# Altium PCB Design Exercise 4 - Surface Mount Board.PcbDoc
Units mil, origin at the board's own origin, x right, y up, seen from the top; angles counter-clockwise.
Board outline 6000 x 4000 mil, 2 copper layers (Top Layer, Bottom Layer); 21 components, 20 nets, 87 pads, 22 vias.
Unrouted connection lines stored in the file: 4.
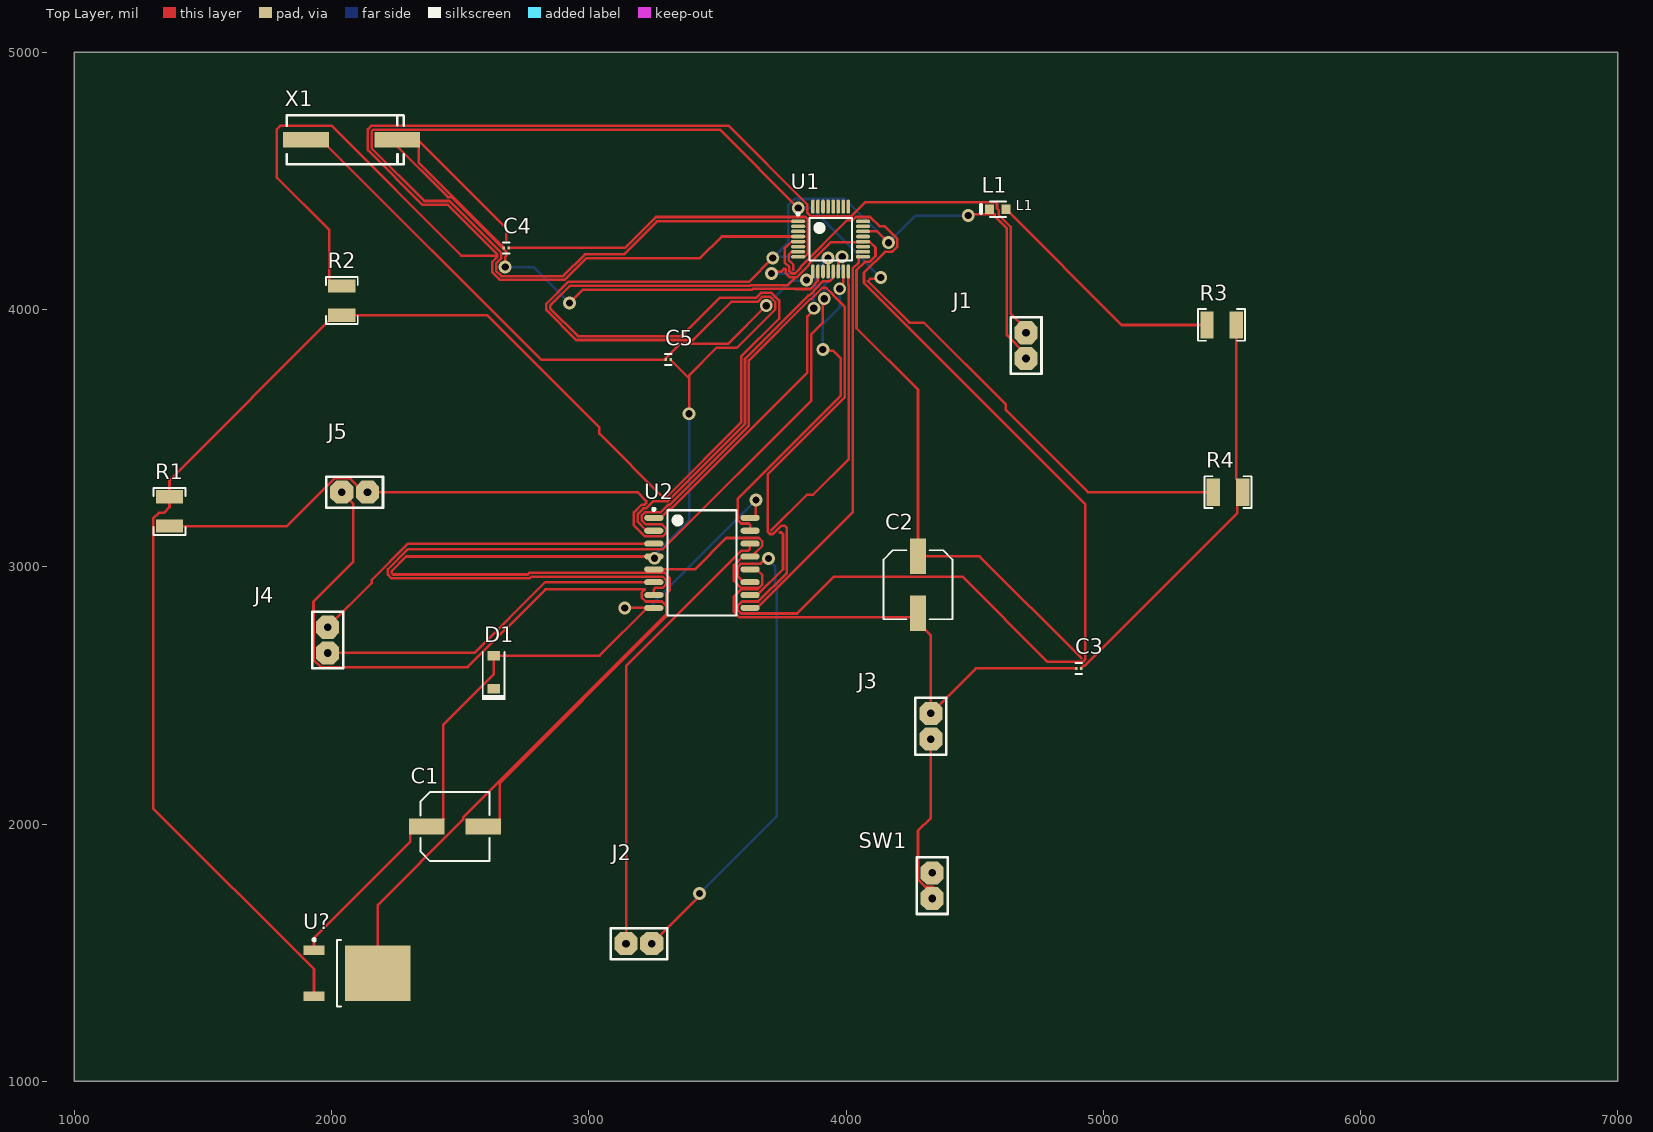
[diagram p0: Top Layer view]
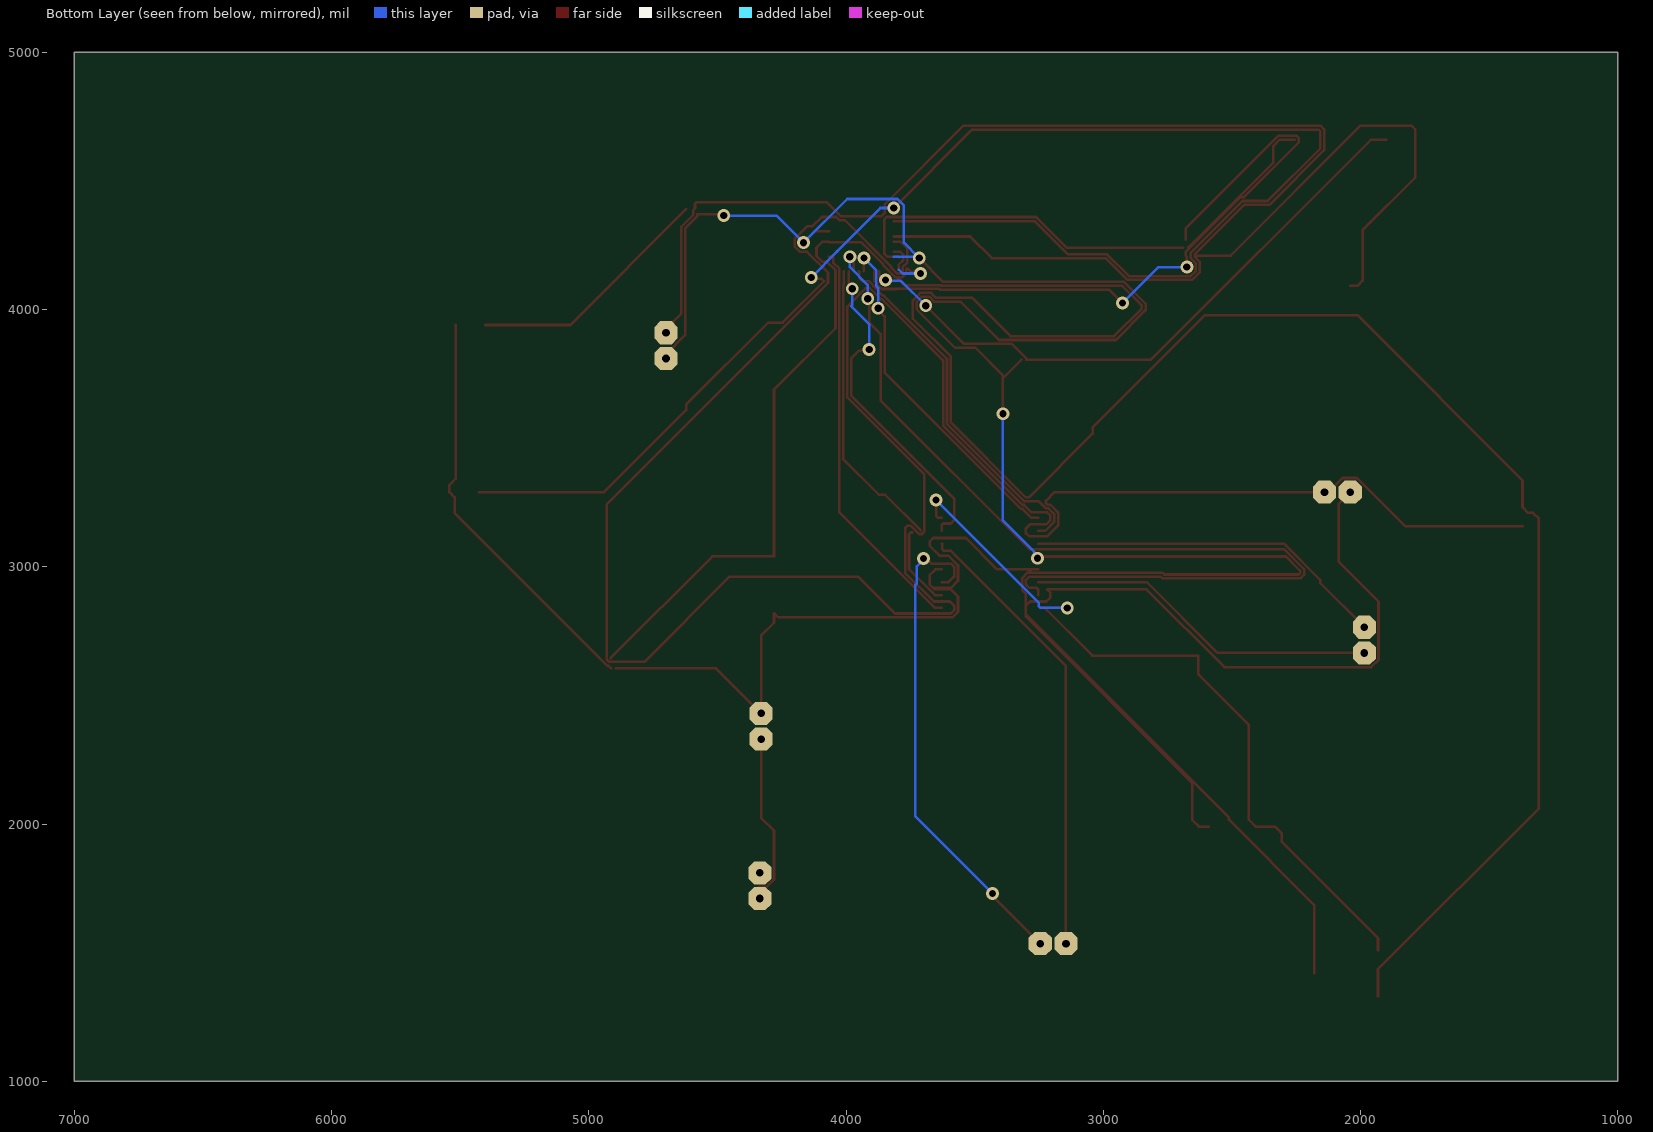
[diagram p1: Bottom Layer view, seen from below]
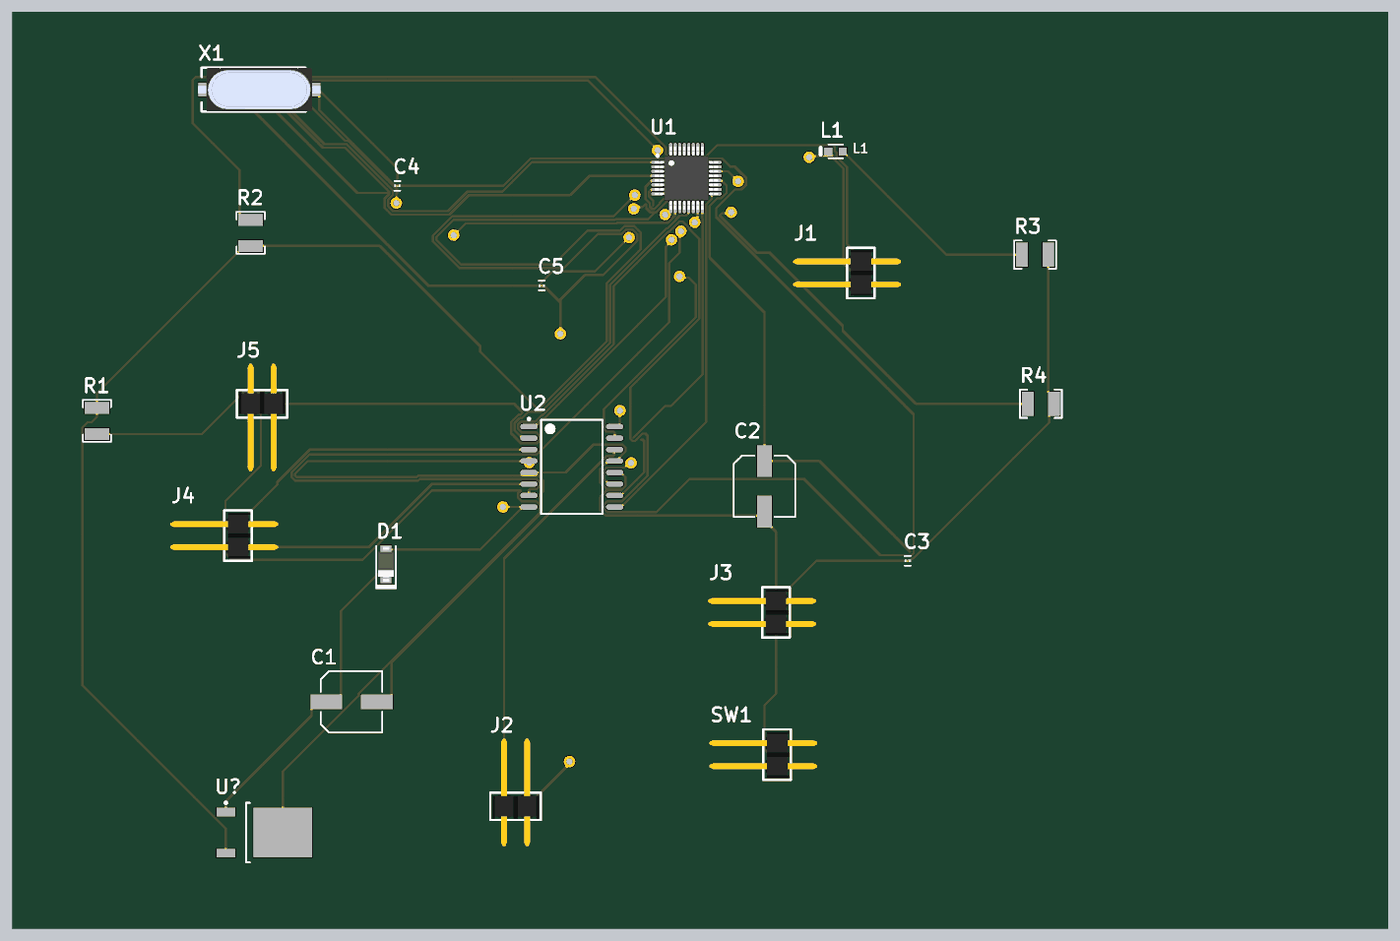
[diagram p2: 3D render of the assembled board from above, using the file's embedded part models]

## Layer stack, top to bottom
Top Solder: solder mask 0.4, Solder Resist, Dk 3.5
Top Layer: signal copper 1.4
Dielectric 1: dielectric 12.6, FR-4, Dk 4.8
Bottom Layer: signal copper 1.4
Bottom Solder: solder mask 0.4, Solder Resist, Dk 3.5

## Board outline
1000,1000 7000,1000 7000,5000 1000,5000

## Design rules (kind name [scope] priority, off if disabled: settings)
Clearance [All] p1: gap=5 ignorepadtopadclearanceinfootprint=FALSE
PolygonConnect [All] p1: connectstyle=Relief reliefconductorwidth=10 reliefentries=4 polygonreliefangle="90 Angle" airgapwidth=10
RoutingVias [All] p1: holewidth=28 width=50 viastyle="Through Hole" minholewidth=28 minwidth=50 maxholewidth=28 maxwidth=50
SolderMaskExpansion [All] p1: expansion=4 istentingtop=FALSE
Width [All] p1: maxlimit=10 minlimit=10 preferedwidth=10
30 further rules are at their usual default settings.

## Components (designator, comment, footprint, x,y, rotation, side; value= is the part's Value field where it differs from the comment)
C1 "100uF" SM_RADIAL_6.3BMM 2480,1990 r0 top value=100pF
C2 "100uF" SM_RADIAL_6.3BMM 4280,2930 r270 top value=100pF
C3 "100nF" FP-GRM033-0_03-MFG 4904.35,2605 r180 top
C4 "22pF" FP-GRM033-0_03-MFG 2679.35,4240 r0 top
C5 "22pF" FP-GRM033-0_03-MFG 3309.35,3805 r0 top
D1 "1N4001" SOD-123 2630,2590 r90 top
J1 "BMPL" "2 PIN HEADER" 4715,3860 r90 top
J2 "MOTOR R" "2 PIN HEADER" 3195,1520 r0 top
J3 "BATT" "2 PIN HEADER" 4345,2380 r90 top
J4 "MOTOR L" "2 PIN HEADER" 2000,2715 r90 top
J5 "BMPR" "2 PIN HEADER" 2090,3305 r180 top
L1 "LED0" LED_0603 4590,4390 r180 top
R1 "10k" 1210 1370,3215 r90 top value=1K
R2 "10K" 1210 2040,4035 r270 top value=1K
R3 "330R" 1210 5460,3940 r0 top value=1K
R4 "10K" 1210 5485,3290 r0 top value=1K
SW1 "SW-SPST" "2 PIN HEADER" 4350,1760 r90 top
U1 "328" TSQFP50P700X700X120-32N 3940.16,4274.02 r0 top
U2 "L293DL" L293 3440,3015 r0 top
U? "L7805CDT-TR" TO-252_N 2099.29,1420 r0 top
X1 "XTAL" "Crystal Oscilator" 2115,4660 r180 top

## Footprints (in the part's own frame and the unit in brackets; to place one, negate y for a bottom-side part, rotate by r counter-clockwise, add the part's x,y. Pads: shape width x height; smd on the part's side, far side on the other; paste and mask are expansions set on the pad)
"2 PIN HEADER" [mil]
  oct 90x90 hole 30: 1(-50,15) 2(50,15)
  silkscreen extent -110,-45 110,75, body extent -100,-160 100,310, height 50
1210 [mm] "1210 from SM-752 data"
  rect 1.3x2.7 smd: 1(-1.45,0) 2(1.45,0)
  silkscreen extent -2.32,-1.57 2.32,1.57, body extent -1.7,-1.35 1.7,1.35, height 1.35
"Crystal Oscilator" [mm]
  rect 4.5x1.5 smd: 1(-3.556,0) 2(5.444,0)
  silkscreen extent -4.19,-2.41 7.34,2.41, body extent -5.83,-2.39 7.75,2.41, height 3.85
FP-GRM033-0_03-MFG [mm]
  rect 0.25x0.3 smd paste+0 mask+0: 1(-0.238,0) 2(0.238,0)
  silkscreen extent -0.32,-0.54 0.32,0.54, body extent -0.46,-0.27 0.46,0.27, height 0.25
L293 [mm] "SOP, 16-Leads, Body 10.29x7.52mm, Pitch 1.27mm, IPC Medium Density"
  oval 1.9x0.6 smd: 1(-4.75,4.445) 2(-4.75,3.175) 3(-4.75,1.905) 4(-4.75,0.635) 5(-4.75,-0.635) 6(-4.75,-1.905) 7(-4.75,-3.175) 8(-4.75,-4.445) 9(4.75,-4.445) 10(4.75,-3.175) 11(4.75,-1.905) 12(4.75,-0.635) 13(4.75,0.635) 14(4.75,1.905) 15(4.75,3.175) 16(4.75,4.445)
  silkscreen extent -4.87,-5.2 3.4,5.42, body extent -3.8,-5.2 3.8,5.2, height 2.65
LED_0603 [mm] "LED, HIGHBRIGHT, BLUE, SMT0603"
  rect 0.9x0.9 smd paste+0: 1(-0.8,0) 2(0.8,0)
  silkscreen extent -0.81,-0.76 1.65,0.76, body extent -0.55,-0.27 1.05,0.53, height 0.8
SM_RADIAL_6.3BMM [mm] "Nichicon 6.3x7.7"
  rect 3.5x1.6 smd: 1(-2.8,0) 2(2.8,0)
  silkscreen extent -3.4,-3.4 3.4,3.4, body extent -3.4,-3.4 3.4,3.4, height 8
SOD-123 [mm] "On Semi recommended land pattern"
  rect 0.915x1.22 smd: 1(-1.637,0) 2(1.637,0)
  silkscreen extent -2.74,-1.17 2.03,1.17, body extent -1.93,-0.9 1.93,0.9, height 1.35
TO-252_N [mm] "D-PAK, 4-Leads, Body 6.1x6.5mm, Pitch 2.28mm, Lead Span 9.7mm, IPC Medium Density"
  rect 2.1x0.95 smd: 1(-4.25,2.28) 3(-4.25,-2.28)
  rect 6.5x5.5 smd: 4(2.05,0)
  silkscreen extent -4.37,-3.3 -1.6,3.43, body extent -2,-3.3 4.2,3.3, height 2.4
TSQFP50P700X700X120-32N [mm] "TSQFP, 32-Leads, Body 5.00x5.00mm, Pitch 0.50mm, IPC Medium Density"
  oval 1.4x0.35 smd: 1(-3.2,1.75) 2(-3.2,1.25) 3(-3.2,0.75) 4(-3.2,0.25) 5(-3.2,-0.25) 6(-3.2,-0.75) 7(-3.2,-1.25) 8(-3.2,-1.75) 17(3.2,-1.75) 18(3.2,-1.25) 19(3.2,-0.75) 20(3.2,-0.25) 21(3.2,0.25) 22(3.2,0.75) 23(3.2,1.25) 24(3.2,1.75)
  oval 0.35x1.4 smd: 9(-1.75,-3.2) 10(-1.25,-3.2) 11(-0.75,-3.2) 12(-0.25,-3.2) 13(0.25,-3.2) 14(0.75,-3.2) 15(1.25,-3.2) 16(1.75,-3.2) 25(1.75,3.2) 26(1.25,3.2) 27(0.75,3.2) 28(0.25,3.2) 29(-0.25,3.2) 30(-0.75,3.2) 31(-1.25,3.2) 32(-1.75,3.2)
  silkscreen extent -3.32,-2.1 2.1,2.6, body extent -3.5,-3.5 3.5,3.5, height 1.2

## Part data
C1 C2: library part "Cap Pol2", "Polarized Capacitor (Axial)", LatestRevisionDate=17-Jul-2002, LatestRevisionNote="Re-released for DXP Platform.", PackageDescription="Polarized Capacitor; 2 Leads", PackageReference=POLAR0.8, Published=8-Jun-2000, Publisher="Altium Limited"
C3 C4 C5: library part CMP-06035-050511-1, "Chip Multilayer Ceramic Capacitors for General Purpose, 0201, 4.0pF, C0G, 30ppm/°C, 0.25pF, 100V", Capacitance=4pF, Case Code (Imperial)=0201, Case Code (Metric)=0603, Dielectric=C0G, Max Operating Temperature=125°C, Min Operating Temperature=-55°C, Package Quantity=15000, Voltage Rating=100V, Case/Package=0201, Height=0.3mm, Length=0.024inch, Mount="Surface Mount", Packaging="Tape and Reel", Termination=SMD/SMT, Thickness=0.013inch, Voltage Rating (DC)=100V, Weight=1.2E-05oz, Width=0.3mm
D1: library part "Diode 1N4001", "1 Amp General Purpose Rectifier", Code_JEDEC=DO-204-AL, ComponentLink1Description="Manufacturer Link", ComponentLink1URL=http://www.fairchildsemi.com/, ComponentLink2Description=Datasheet, ComponentLink2URL=http://www.fairchildsemi.com/ds/1N%2F1N4001.pdf, DatasheetVersion=1998, LatestRevisionDate=17-Jul-2002, LatestRevisionNote="Re-released for DXP Platform.", PackageDescription="Diode, Axial; Body 5.2 x 2.7 mm (LxDia. max), Lead Dia. 0.86 mm (max)", PackageReference=DO-41, PackageVersion=Aug-1999, Published=8-Jun-2000, Publisher="Altium Limited"
J1 J2 J3 J4 J5: library part "Header 2", "Header, 2-Pin", LatestRevisionDate=17-Jul-2002, LatestRevisionNote="Re-released for DXP Platform.", Publisher="Altium Limited"
L1: "Typical INFRARED GaAs LED", LatestRevisionDate=08-Jul-2005, LatestRevisionNote="Mech Layer 1 removed.", PackageDescription="LED; 2 Leads", PackageReference=LED-0, Published=8-Jun-2000, Publisher="Altium Limited"
R1 R2 R3 R4: library part Res2, "Resistor", LatestRevisionDate=17-Jul-2002, LatestRevisionNote="Re-released for DXP Platform.", PackageDescription="Axial Device, Thru-Hole; 2 Leads; 0.4 in Pin Spacing", PackageReference=AXIAL-0.4, Published=8-Jun-2000, Publisher="Altium Limited"
SW1: "Single-Pole, Single-Throw Switch", LatestRevisionDate=17-Jul-2002, LatestRevisionNote="Re-released for DXP Platform.", PackageDescription="Switch; 2 Leads", PackageReference=SPST-2, Published=24-Mar-1999, Publisher="Altium Limited"
U1: library part "Atmega 168"
U?: library part CMP-0244-00216-1, "Positive Voltage Regulator, 3-Pin DPAK, Tape and Reel", ComponentLink1Description="Manufacturer URL", ComponentLink1URL=http://www.st.com, ComponentLink2Description=Datasheet, ComponentLink2URL=http://www.st.com/internet/com/TECHNICAL_RESOURCES/TECHNICAL_LITERATURE/DATASHEET/CD00000444.pdf, DatasheetVersion=16/11/2011, PackageDescription="3-Pin Transistor Outline Package 2.28 mm Pitch, 9.7 mm Lead Span (DPAK)", PackageReference=TO-252, PackageVersion=2011
X1: "Crystal Oscillator", LatestRevisionDate=17-Jul-2002, LatestRevisionNote="Re-released for DXP Platform.", PackageDescription="Crystal, Thru-Hole; 2 Leads; Body 3.1 x 8.2 mm (Dia.xH)", PackageReference=R38, Published=8-Jun-2000, Publisher="Altium Limited"

## Via types
v1: diameter 50, hole 28, Top Layer to Bottom Layer, 22 vias

## Nets (pads, with @x,y where several pads share a name; then routed paths per layer and width w, separated by ;. In a path a pad name is that pad's centre, name@x,y a point inside that pad or via, vN(x,y) a via of type N, cw(c..) or ccw(c..) an arc to the next point about the centre after c; other vN are vias at no path point)
5V: C2.1 C3.1 R1.2 R2.2 R3.2 R4.2 U1.7 U1.20 U?.3 | length 12231
  Top Layer w10: U?.3 1931.97,1435.58 1306.85,2060.7 1306.85,3187.65 1328.78,3209.57 1348.08,3209.57 1370,3231.5 R1.2 1370,3335.47 2012.44,3977.91 R2.2 2604.2,3977.91 3040.9,3541.21 3040.9,3517.89 3288.79,3270 3301.21,3270 3592.5,3561.29 3592.5,3816.61 3740,3964.11 3740,4035.71 3710.71,4065 3669.29,4065 3649.29,4045 3508.98,4045 3360.42,3896.44 2957.35,3896.44 2850,4003.79 2850,4016.21 2926.17,4092.39 3628.6,4092.39 3631.21,4095 3773.67,4095 3803.67,4125 ; v1(3710,4140) 3717.65,4147.65 3748.48,4147.65 3759.05,4158.23 3765,4158.23 3765,4142.57 3782.57,4125 3803.67,4125 ; 3795,4155 3795,4174.36 3776.61,4192.75 3776.61,4212.11 3788.58,4224.08 3813.45,4224.08 U1.7 ; U1.20 4066.86,4263.45 4091.73,4263.45 4114.56,4240.63 4114.56,4208.98 4091.17,4185.59 4073.69,4185.59 4040.94,4152.85 4040.94,3927.28 4280,3688.23 C2.1 4519.76,3040.24 4915,2645 ; U1.20@4066.86,4261.38 3940.05,4261.38 3854.37,4175.7 3854.37,4171.94 3807.43,4125 3803.67,4125 ; C3.1 4913.7,2605.83 4922.87,2615 4927.43,2615 5521.5,3209.07 5521.5,3269.41 R4.2 5542.09,3317.56 5517.09,3342.56 R3.2
  Bottom Layer w10: v1(3710,4140) 3780,4140 3795,4155
9V: C1.1 D1.2 U2.8 U2.16 U?.1 | length 3033
  Top Layer w10: U?.1 1931.97,1556.54 2305.87,1930.43 2305.87,1963.5 2332.36,1990 C1.1 2407.17,1990 2433.66,2016.5 2433.66,2385.36 2630,2581.7 D1.2 3041.87,2654.47 U2.8@3227.4,2840 ; v1(3140,2840) U2.8@3227.4,2840 ; U2.8@3240.2,2840 U2.8@3227.4,2840 ; U2.16 3642.51,3190 3648.8,3196.29 3648.8,3258.8 v1(3650,3260)
  Bottom Layer w10: v1(3140,2840) 3244.14,2840 3250,2845.86 3250,2860 v1(3650,3260)
GND: C1.2 C2.2 C3.2 C4.2 C5.2 J1.1 J3.2 J5.2 L1.2 U1.8 U1.22 U2.4 U2.5 U2.12 U2.13 U?.4 | length 17209.9
  Top Layer w10: J5.2 2084.36,3245.64 2084.36,3019.18 1930,2864.82 1930,2638.36 1958.36,2610 2529.36,2610 2831.17,2911.81 3218.37,2911.81 3205.59,2899.03 3205.59,2880.97 3221.56,2865 3284.43,2865 3300.39,2849.03 ; U?.4 2180,1685.7 2511.34,2017.04 2511.34,2025.64 3300.39,2814.69 ; C1.2 2627.64,1990 2654.13,2016.5 2654.13,2159.64 3300.39,2805.9 3300.39,2814.69 ; C4.2 3141.11,4240 3260.91,4359.8 3820.39,4359.8 3841.84,4359.8 3851.73,4349.91 3851.73,4217.81 3839.77,4205.84 3814.9,4205.84 U1.8 3794.3,4205.12 U1.8@3791.61,4202.43 ; U2.5 U2.5@3278.58,2990 ; U2.4 2290,3040 2234.14,2984.14 2234.14,2975.86 2240,2970 2763.51,2970 2770.32,2976.81 3293.83,2976.81 3315.39,2955.25 3315.39,2909.64 3300.39,2894.64 3300.39,2849.03 ; 3291.77,2976.81 U2.5@3278.58,2990 ; C5.2 3318.7,3804.17 3390,3732.87 ; v1(3390,3595) 3390,3732.87 ; U2.12 3652.6,2990 3674.41,2968.19 3674.41,2930.97 3661.63,2918.19 ; v1(3715,4200) 3622.39,4107.39 2919.96,4107.39 2835,4022.43 2835,3997.57 2951.13,3881.44 3405.41,3881.44 3553.97,4030 3655.5,4030 3675.5,4050 3704.5,4050 3725,4029.5 3725,4000.5 3575.94,3851.44 3497.29,3851.44 3390,3744.15 3390,3732.87 ; U1.22 4121.46,4303.54 v1(4165,4260) ; v1(4475,4365) 4479.72,4369.72 4578.78,4369.72 4578.78,4361.93 4625.09,4315.62 4625.09,3900.34 4700,3825.43 J1.1 ; C3.2 4505,2605 J3.2 4330,2732.36 4280,2782.36 C2.2 4263.43,2803.19 3586.17,2803.19 3564.61,2824.75 3564.61,2884.03 3593.5,2912.93 3656.37,2912.93 3661.63,2918.19 ; U2.5@3278.58,2990 3412.35,2990 3534.16,3111.81 3661.63,3111.81 3674.41,3099.03 3674.41,3080.97 3636.55,3043.11 3602.47,3043.11 3564.61,3005.25 3564.61,2945.97 3592.38,2918.19 3661.63,2918.19 ; 3300.39,2814.69 3300.39,2849.03
  Bottom Layer w10: v1(3255,3033.19) 3255,3044.01 3269.14,3058.16 3269.14,3059.14 3390,3180 v1(3390,3595) ; v1(3715,4200) v1@3720,4205 ; 3815,4205 v1@3720,4205 ; v1(4475,4365) 4270,4365 v1(4165,4260) 3995.2,4429.8 3799.68,4429.8 3775,4405.13 3775,4260 v1@3720,4205
NetC4_1: C4.1 U1.10 X1.1 | length 3309.5
  Top Layer w10: X1.1 2314.06,4660 2338.58,4635.47 2338.58,4572.24 2647.32,4263.5 ; C4.1 2670,4240.83 2647.32,4263.5 ; v1(2675,4165) 2675,4204.73 2679.37,4209.09 2679.37,4224.37 2666.87,4236.87 2643.77,4259.96 ; 2680,4270.91 2680,4315.27 2320.27,4675 2248.79,4675 2240,4666.21 2240,4649.61 2452.62,4436.99 2466.74,4436.99 2643.77,4259.96 ; v1(2925,4025) 2976.54,4076.54 3633.96,4076.54 3637.43,4080 3803.44,4080 3803.69,4079.75 3861.17,4079.75 3878.46,4097.04 3878.46,4099.11 3890.22,4110.87 3890.22,4147.31 U1.10 ; 2643.77,4259.96 2647.32,4263.5
  Bottom Layer w10: v1(2675,4165) 2785,4165 v1(2925,4025)
NetC5_1: C5.1 U1.9 X1.2 | length 2482
  Top Layer w10: X1.2 1959.72,4660 2814.72,3805 C5.1 3300.08,3805.08 3300.08,3811.35 3355.17,3866.44 3541.44,3866.44 v1(3690,4015) ; v1(3846.67,4114.75) 3854.33,4122.4 3865.28,4122.4 3871.26,4128.39 U1.9
  Bottom Layer w10: v1(3690,4015) 3786.54,4111.54 3843.46,4111.54 v1(3846.67,4114.75)
NetJ1_2: J1.2 R2.1 U1.4 | length 7092.5
  Top Layer w10: R2.1 2012.44,4092.09 1991.85,4112.68 1991.85,4308.29 1787.09,4513.06 1787.09,4699.88 1801.73,4714.53 1999.61,4714.53 2505.04,4209.09 2645,4209.09 ; U1.4 3517.13,4283.86 3432.7,4199.43 2990.79,4199.43 2906.36,4115 2654.29,4115 2625,4144.29 2625,4185.71 2645,4205.71 2645,4213.99 2452.01,4406.99 2354.54,4406.99 2141.42,4620.12 2141.42,4699.88 2156.06,4714.53 3543.95,4714.53 3849.17,4409.3 3849.17,4377.53 3864.26,4362.44 4019.9,4362.44 4075.18,4417.72 4580.36,4417.72 4587.07,4411.01 4587.07,4392.93 4593.78,4386.22 4593.78,4368.14 4640.09,4321.83 4640.09,3985.34 4700,3925.43 J1.2
NetJ2_1: J2.1 U2.14 | length 1770.3
  Top Layer w10: J2.1 3145,2614.43 3592.38,3061.81 3619.14,3061.81 3625,3067.67 3625,3087.99 U2.14
NetJ2_2: J2.2 U2.11 | length 1936.6
  Top Layer w10: J2.2 3430,1720 v1(3430,1730) ; U2.11 3601.42,2940 3579.61,2961.81 3579.61,2999.03 3592.38,3011.81 3667.49,3011.81 3687.43,3031.75 v1(3698.25,3031.75)
  Bottom Layer w10: v1(3430,1730) 3730,2030 3730,2930 3725,2935 3725,3001.93 3698.25,3028.67 v1(3698.25,3031.75)
NetJ3_1: J3.1 SW1.1 | length 639.1
  Top Layer w10: J3.1 4330,2024.18 4280,1974.18 4280,1783.36 4308.36,1755 4340,1755
NetJ4_1: J4.1 U2.6 | length 1381.9
  Top Layer w10: J4.1 2555.8,2665 2830.8,2940 U2.6
NetJ4_2: J4.2 U2.3 | length 1409.9
  Top Layer w10: J4.2 2156.39,2936.39 2156.39,2948.82 2297.57,3090 U2.3
NetJ5_1: J5.1 R1.1 U1.5 | length 9576.5
  Top Layer w10: R1.1 1826.27,3157.91 2013.36,3345 2069.57,3345 2124.57,3290 3188.88,3290 3222.92,3255.95 3222.92,3247.67 3217.07,3241.81 3205.94,3241.81 3175.59,3211.46 3175.59,3160.97 3218.37,3118.19 3287.62,3118.19 3300.39,3130.97 3300.39,3149.03 3284.43,3165 3221.56,3165 3205.59,3180.97 3205.59,3199.03 3218.37,3211.81 3279.18,3211.81 3307.37,3240 3313.64,3240 3622.5,3548.86 3622.5,3802 3860.5,4040 3863.85,4040 3908.46,4084.61 3922.66,4084.61 3950.56,4056.72 3950.56,4054.94 3995.22,4010.29 3995.22,3659.35 3695,3359.13 3695,3136.21 3703.79,3127.43 3716.21,3127.43 3748.79,3160 3761.21,3160 3770,3151.21 3770,2976.56 3658.44,2865 3595.57,2865 3579.61,2849.03 3579.61,2830.97 3592.38,2818.19 3809.75,2818.19 3952.9,2961.34 4452.76,2961.34 4784.1,2630 4921.21,2630 4930,2638.79 4930,3243.79 4070,4103.79 4070,4143.21 4150.93,4224.13 4178.63,4224.13 4200,4245.5 4200,4274.5 4150.45,4324.05 4129.56,4324.05 4093.81,4359.8 4038.48,4359.8 4026.11,4347.44 4004.9,4347.44 3823.45,4165.99 3823.45,4162.24 3801.21,4140 3788.79,4140 3780,4148.79 3780,4164.44 3761.61,4182.83 3761.61,4236.48 3788.58,4263.45 3813.45,4263.45 U1.5
NetL1_1: L1.1 R3.1 | length 967.8
  Top Layer w10: L1.1 5071.5,3940 R3.1
NetR4_1: R4.1 U1.1 | length 6058.8
  Top Layer w10: U1.1 3265.24,4342.91 3136.75,4214.43 2984.58,4214.43 2900.15,4130 2660.5,4130 2640,4150.5 2640,4179.5 2660,4199.5 2660,4220.21 2458.22,4421.99 2360.76,4421.99 2156.42,4626.33 2156.42,4693.67 2162.28,4699.53 3509.45,4699.53 v1(3814.17,4394.8) ; v1(4135,4125) 4130,4120 4095,4120 4085,4110 4246.02,3948.98 4302.24,3948.98 4621.12,3630.1 4621.12,3608.88 4940,3290 R4.1
  Bottom Layer w10: v1(3814.17,4394.8) 3866.29,4394.8 4035.05,4226.05 4035.05,4224.95 v1(4135,4125)
NetU1_12: U1.12 U2.1 | length 1361
  Top Layer w10: U2.1 3278.58,3190 3313.58,3225 3319.85,3225 3850,3755.15 3850,3973.43 3875,3998.43 v1(3875,4005) ; U1.12 v1(3930.31,4199.9)
  Bottom Layer w10: v1(3875,4005) 3875,4084.03 3881.67,4090.7 3881.67,4151.26 v1(3930.31,4199.9)
NetU1_13: U1.13 U2.2 | length 1421.3
  Top Layer w10: U2.2 3225.34,3140 3190.59,3174.75 3190.59,3205.25 3212.15,3226.81 3223.28,3226.81 3251.47,3255 3307.43,3255 3607.5,3555.07 3607.5,3808.21 3854.29,4055 3857.63,4055 3893.46,4090.83 3893.46,4092.9 3911.04,4110.47 3937.31,4110.47 3949.28,4122.44 3949.28,4147.31 U1.13
NetU1_14: U1.14 U2.7 | length 3800.5
  Top Layer w10: U2.7 3252.99,2912.33 3258.85,2918.19 3287.62,2918.19 3300.39,2930.97 3300.39,2949.03 3287.62,2961.81 2776.53,2961.81 2769.72,2955 2233.79,2955 2219.14,2969.64 2219.14,2990.36 2296.98,3068.19 3287.62,3068.19 3865,3645.57 3865,3904.5 3910,3949.5 v1@3910,4018.95 ; v1@3913.89,4018.95 3913.89,4040.55 v1(3915.56,4042.22) ; U1.14 3970.41,4148.75 3970.41,4179.87 3985.05,4194.51 v1(3985.05,4205.34)
  Bottom Layer w10: v1(3915.56,4042.22) 3915.56,4095.56 3985.05,4165.05 v1(3985.05,4205.34)
NetU1_15: U1.15 U2.15 | length 1297.1
  Top Layer w10: U2.15 3627.01,3162.33 3621.15,3168.19 3592.38,3168.19 3579.61,3180.97 3579.61,3264.95 3980.22,3665.56 3980.22,3809.78 3950,3840 3915,3840 v1(3910,3845) ; v1(3975.9,4080.86) 3975.9,4091.68 3989.37,4105.15 U1.15
  Bottom Layer w10: v1(3910,3845) 3910,3942.91 3980,4012.91 3975,4017.91 3975,4079.96 v1(3975.9,4080.86)
NetU1_16: U1.16 U2.10 | length 1466.3
  Top Layer w10: U2.10 3654.66,2890 3755,2990.34 3755,3127.25 3749.14,3133.11 3743.11,3133.11 ; 3710,3142.43 3847.57,3280 3872.43,3280 4010.9,3418.48 4010.9,4095.36 4009.06,4097.2 U1.16
NetU1_17: U1.17 U2.9 | length 1571.6
  Top Layer w10: U2.9 3654.66,2840 4025.94,3211.29 4025.94,4159.06 4050.11,4183.23 4050.11,4203.37 4051.86,4205.12 U1.17
pads on no net: D1.1 SW1.2 U1.2 U1.3 U1.6 U1.11 U1.18 U1.19 U1.21 U1.23 U1.24 U1.25 U1.26 U1.27 U1.28 U1.29 U1.30 U1.31 U1.32